# Altium PCB agent-mother.PcbDoc (part 2 of 2)
Units mil, origin at the board's own origin, x right, y up, seen from the top; angles counter-clockwise.
Board outline 953.44 x 2371.62 mil, 4 copper layers (Top Layer, Layer 1, Layer 2, Bottom Layer), stack 62.493 mil thick; 58 components, 47 nets, 288 pads, 86 vias.
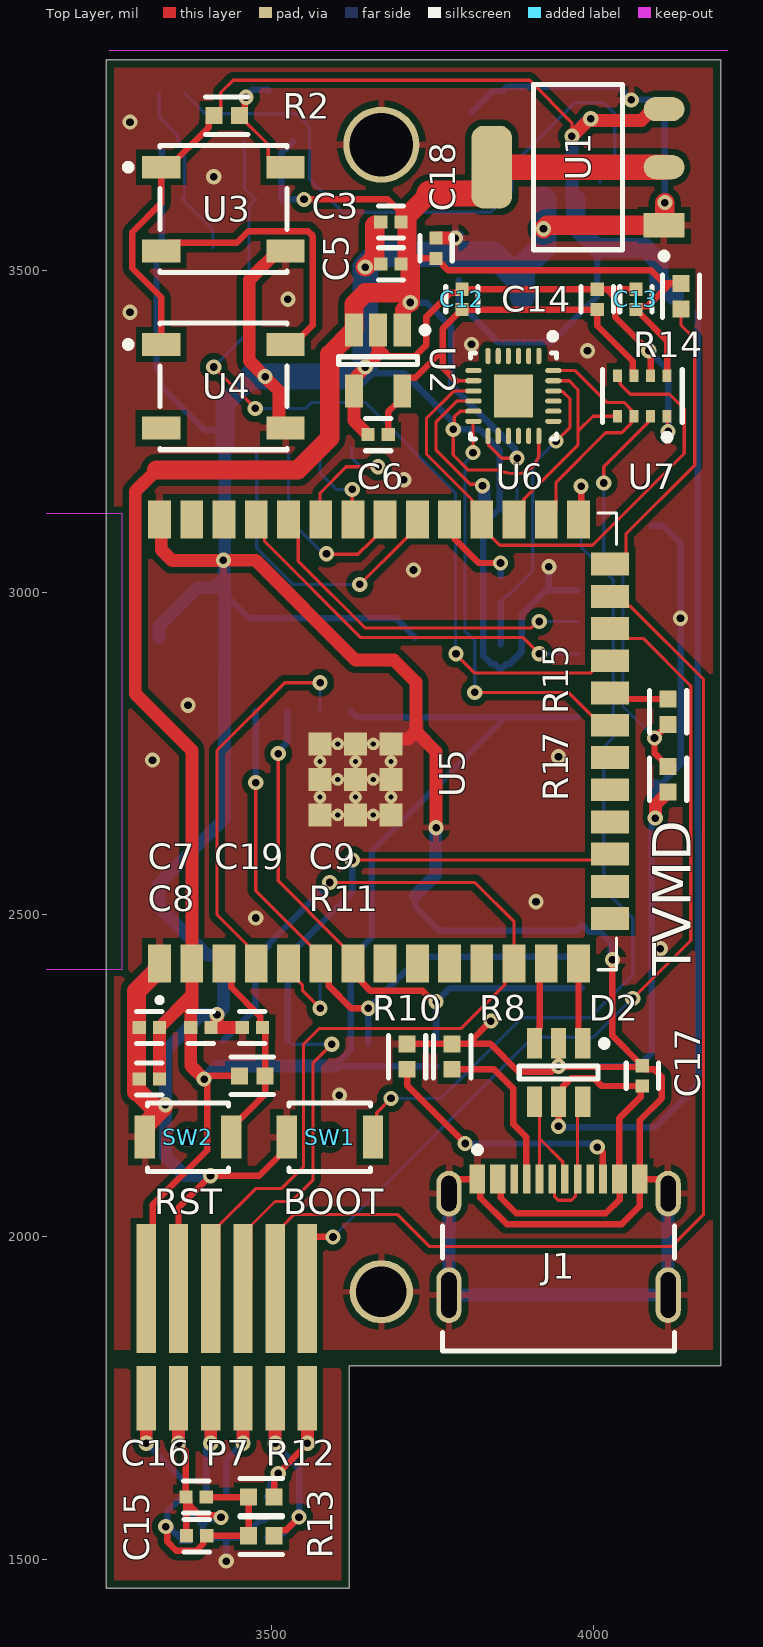
[diagram p0: Top Layer view]

## Via types
v1: diameter 23.62, hole 11.81, Top Layer to Bottom Layer, tented both sides, 86 vias

## Nets (pads, with @x,y where several pads share a name; then routed paths per layer and width w, separated by ;. In a path a pad name is that pad's centre, name@x,y a point inside that pad or via, vN(x,y) a via of type N, cw(c..) or ccw(c..) an arc to the next point about the centre after c; other vN are vias at no path point) (continued)
SDO: (continued)
  Top Layer w5: U6.9 3782.87,3312.87 3740,3270 3740,3215 3810.73,3144.27 3810.73,3128.76 U5.30 3825.94,3101.73 3847.85,3079.82 3847.85,3079.72 3853.93,3073.64 3854.04,3073.64 3854.29,3073.39 3997.7,3073.39 4140,3215.68 4140,3285 4117.2,3307.8 4056.49,3307.8 4040.87,3323.42 4040.87,3332.24 U7.5
TX: P1.3 U5.37 | length 597.9
  Top Layer w5: U5.37 3488.74,3100.74 3488.74,3079.44 3638.19,2930 3890,2930 v1(3915,2905)
  Bottom Layer w5: v1(3915,2905) P1.3
"USB D+": D2.1 U5.14 | length 127
  Top Layer w10: U5.14 3975.94,2306.73 D2.1
"USB D-": D2.3 U5.13 | length 131.9
  Top Layer w10: D2.3 3914.41,2307.09 3914.41,2323.57 3915.59,2324.76 3915.59,2414.21 U5.13
V_Bat: P3.3 R3.2 | length 1008.7
  Bottom Layer w5: R3.2 3364.77,3774.92 3375.42,3764.26 3375.51,3764.26 3396.67,3743.1 3538.07,3743.1 3558.52,3722.64 3558.52,3641.48 3610,3590 3840,3590 3872.89,3622.89 3872.89,3662.89 3970,3760 4015,3760 4032.26,3742.74 4032.26,3669.14 4009.21,3646.1 P3.3@4009.21,3636.26
V_Bat_Measure: C4.1 D1.1 R3.1 R4.2 | length 278
  Bottom Layer w5: R3.1 3325.23,3737.96 3354.03,3709.16 3354.03,3703.67 3354.12,3703.58 3354.12,3700.74 3364.77,3690.08 3364.77,3614.02 C4.1 3408.9,3561.85 D1.1
VCC: C1.2 C2.1 C17.1 D2.5 J1.A4-B9 J1.B4-A9 P3.2 R2.1 U1.3 U3.1 U4.1 | length 4083
  Top Layer w5: R2.1 3420.88,3750.65 3420.88,3775.88 3440,3795 3900,3795 3965.75,3729.25 v1@3965.75,3710.75
  Top Layer w10: U4.1 3328.54,3458.05 3283.3,3503.29 3283.3,3559.14 3328.54,3604.39 U3.1 3340.35,3659.96 3402.08,3721.68 3402.08,3731.85 R2.1 ; J1.A4-B9 3855.2,2085.16 3855.2,2060.99 3879.5,2036.69 4018.45,2036.69 4039.82,2058.06 4039.82,2080.81 4044.17,2085.16 J1.B4-A9 4039.49,2184.49 4072.81,2217.81 4072.81,2232.06 C17.1 4011.51,2234.25 3999.55,2246.22 3964.6,2246.22 3951.81,2233.44 3951.81,2216.54 D2.5 v1(3945,2171.81)
  Top Layer w20: v1(3965.75,3708.19) v1@3965.75,3709.86 ; v1@3965.75,3710.75 v1@3965.75,3709.86 ; U1.3 4091.09,3750.16 4073.58,3732.65 3998.34,3732.65 3995.98,3735 v1(3995,3735) 3994.31,3734.31 3992.85,3734.31 3967.42,3708.88 3966.73,3708.88 v1@3965.75,3709.86
  Bottom Layer w10: C2.1 3790,3450 3851.93,3388.07 3933.48,3388.07 4005,3459.59 4005,3535 ; v1(3945,2171.81) 3946.81,2170 4095.15,2170 4161.46,2236.31 4161.46,2631.28 4161.1,2631.63 C1.2@4161.1,3435
  Bottom Layer w20: P3.2@3965.75,3610 v1(3965.75,3708.19) 3991.87,3734.31 3994.31,3734.31 v1(3995,3735)
  Bottom Layer w30: P3.2 3971.54,3609.25 3971.54,3568.46 4005,3535 4078.8,3535 4100.63,3513.17 4100.63,3484.37 C1.2
VDD_SPI_EN: R14.1 U5.26 | length 466.3
  Top Layer w5: U5.26 4036.97,3044.06 4049.69,3056.77 4049.69,3091.12 4156.34,3197.77 4156.34,3393.66 4135,3415 R14.1
x_servo_pwm: P4.2 U5.32 | length 477.8
  Top Layer w5: v1(3636.51,3012.65) 3636.96,3012.65 3704.04,3079.72 3704.04,3079.82 3710.82,3086.61 3710.82,3098.42 U5.32
  Bottom Layer w5: P4.2 3476.57,3068.43 3532.35,3012.65 v1(3636.51,3012.65)
y_servo_pwm: P4.3 U5.33 | length 313.1
  Top Layer w5: v1(3585,3060) 3585.67,3059.33 3633.65,3059.33 3654.04,3079.72 3654.04,3079.82 3670.71,3096.49 3670.71,3108.3 U5.33
  Bottom Layer w5: P4.3 3525.79,3114.21 3580,3060 v1(3585,3060)
pads on no net: J1.A8 J1.B8 P1.4 SW1. SW2. U4.2 U5.8 U5.9 U5.10 U5.11 U5.15 U5.16 U5.18 U5.19 U5.20 U5.38 U5.39 U6.1 U6.2 U6.3 U6.4 U6.5 U6.6 U6.7 U6.14 U6.15 U6.16 U6.17 U6.19 U6.20 U6.21 U6.25 U8.8

## Polygon pours and split planes (outlines as drawn)
GND on Bottom Layer "GND_L04_P004" (solid, remove dead copper, pour order 4): 3243.17,3826.62 3243.17,1825 4196.61,1825 4196.61,3826.62
EXT_OPT_GND on Bottom Layer "EXT_OPT_GND_L04_P006" (solid, pour order 6): 3243.17,1795.74 3243.17,1455 3620,1455 3620,1795.98
GND on Bottom Layer "GND_L04_P001" (solid, pour order 1): 3734.71,2625 3540,2625 3540,2800 3734.71,2800
GND on Top Layer "GND_L01_P003" (solid, remove dead copper, pour order 3): 3243.17,3826.62 3243.17,1825 4196.61,1825 4196.61,3826.62
GND on Top Layer "GND_L01_P000" (solid, pour order 0): 3735,2625 3540,2625 3540,2800 3735,2800
EXT_OPT_GND on Top Layer "EXT_OPT_GND_L01_P007" (solid, pour order 7): 3243.17,1795.78 3243.17,1455 3620,1455 3620,1796.03

## Silkscreen, mask and mechanical layers (free items; w line width, h text height)
Top Overlay:
  text "TVMD" at 4150,2405 h60 r90
Bottom Overlay:
  drawing of 3 lines, arcs and shapes, not listed
Mechanical 1:
  the board outline again, w10

## Text inside footprints (layer, text, board x,y; h text height)
U5: Top 3D Body "ANTENNA" at 3159.02,2591.89 h50 r90